# Altium PCB pcb.PcbDoc
Units mm, origin at the board's own origin, x right, y up, seen from the top; angles counter-clockwise.
Board outline 9 x 13 mm, 2 copper layers (Top Layer, Bottom Layer); 12 components, 13 nets, 55 pads, 0 vias.
Unrouted connection lines stored in the file: 2.
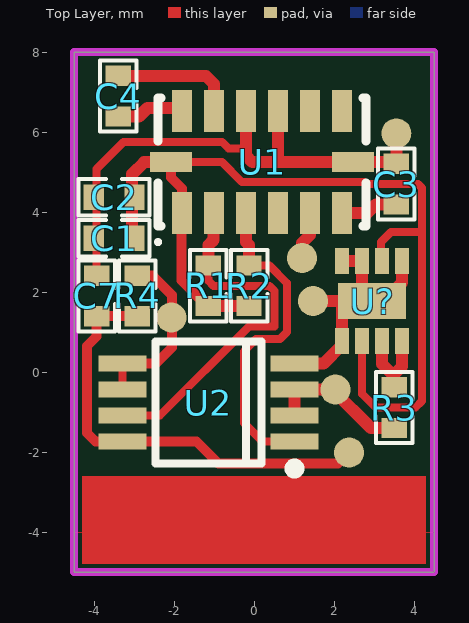
[diagram p0: Top Layer view]
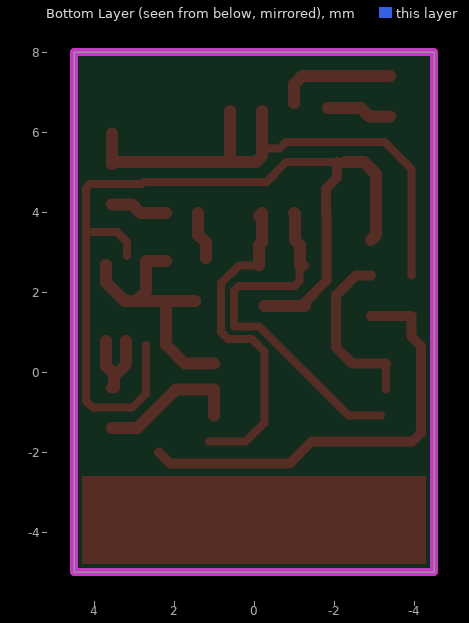
[diagram p1: Bottom Layer view, seen from below]
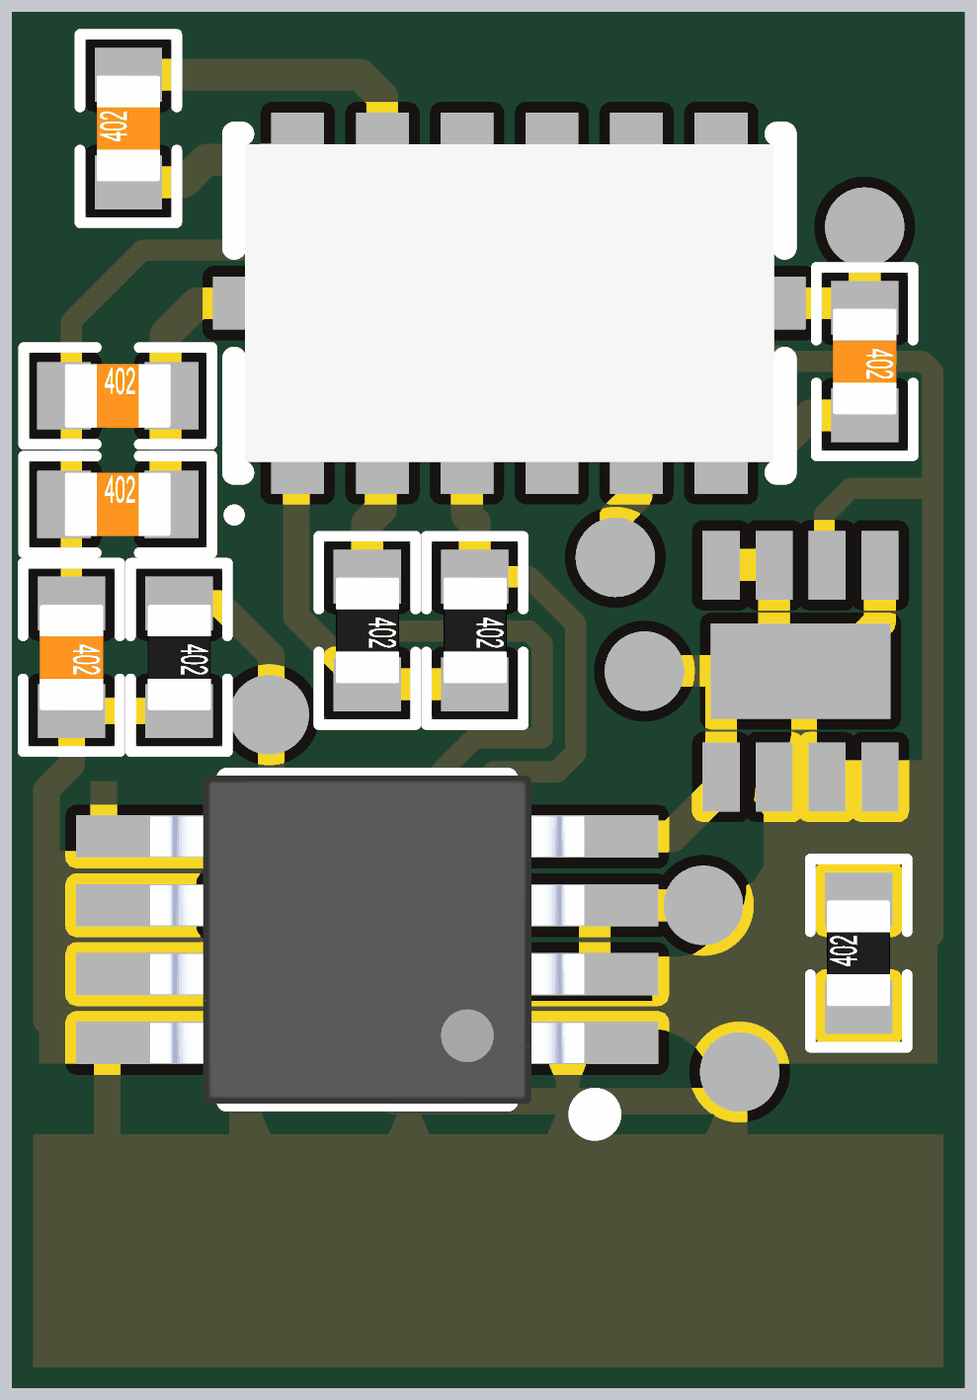
[diagram p2: 3D render of the assembled board from above, using the file's embedded part models]

## Layer stack, top to bottom
Top Solder: solder mask 0.0102, Solder Resist, Dk 3.5
Top Layer: signal copper 0.0356
Dielectric1: dielectric 0.32, FR-4, Dk 4.8
Bottom Layer: signal copper 0.0356
Bottom Solder: solder mask 0.0102, Solder Resist, Dk 3.5

## Board outline
-4.5,-4 -4.5,4.1 -4.5,4.091 -4.5,6.1 -4.5,8 4.5,8 4.5,-5 -4.5,-5

## Design rules (kind name [scope] priority, off if disabled: settings)
Clearance [All] p1: gap=0.1
FabricationTestPointUsage TestPointUsage [All] p1: valid=0 allowmultiple=FALSE
FabricationTestpoint Testpoint [All] p1: side=3 testpointundercomponent=TRUE minsize=1.016 maxsize=2.54 preferedsize=1.524 minholesize=0 maxholesize=1.016 preferedholesize=0.813 testpointgrid=0.025 allowsidetop=TRUE allowsidebottom=TRUE usegrid=TRUE gridtolerance=0
PlaneConnect [All] p1: planeconnectstyle=Relief reliefexpansion=0.508 reliefentries=4 reliefconductorwidth=0.4 reliefairgap=0.4
PolygonConnect [All] p1: connectstyle=Relief reliefconductorwidth=0.254 reliefentries=4 polygonreliefangle="90 Angle" airgapwidth=0.254
RoomDefinition sch [InComponentClass('sch')] p1: confinementstyle=ConfineIn formatcopy=TRUE lockcomponents=FALSE outline -29.537,-20.473 25.835,-20.473 25.835,24.18 -29.537,24.18
RoutingVias [All] p1: holewidth=0.5 width=1.2 viastyle="Through Hole" minholewidth=0.5 minwidth=1.2 maxholewidth=0.5 maxwidth=1.2
SolderMaskExpansion [All] p1: expansion=0.102
Width [All] p1: maxlimit=0.4 minlimit=0.2 preferedwidth=0.4 minimp=50.000000 maximp=50.000000 favimp=50.000000
27 further rules are at their usual default settings.

## Classes and differential pairs
component class sch: C1 C2 C3 C4 R1 R2 R3 R4 U1 U2 U?

## Components (designator, comment, footprint, x,y, rotation, side; value= is the part's Value field where it differs from the comment)
C1 "100nF" C0402 -3.5,3.35 r0 top
C2 "4,7uF" C0402 -3.5,4.375 r0 top
C3 "4,7uF" C0402 3.556,4.699 r270 top
C4 "220nF" C0402 -3.4,6.9 r90 top
C7 "4,7uF" C0402 -3.937,1.905 r270 top
R1 "4k3" R0402 -1.143,2.159 r270 top
R2 "4k3" R0402 -0.127,2.159 r270 top
R3 "4k3" R0402 3.5,-0.889 r90 top
R4 "4k3" R0402 -2.921,1.905 r270 top
U1 "LSM303DLHC" LGA80P500X300-14N 0.2,5.25 r90 top
U2 "P82B96DP" TSSOP8N -1.143,-0.762 r90 top
U? "MCP1710T-30I/LZ" VDFN8 2.95,1.775 r270 top

## Footprints (in the part's own frame and the unit in brackets; to place one, negate y for a bottom-side part, rotate by r counter-clockwise, add the part's x,y. Pads: shape width x height; smd on the part's side, far side on the other; paste and mask are expansions set on the pad)
C0402 [mil]
  rect 20x25 smd: 1(-20,0) 2(20,0)
  silkscreen extent -35,-18 35,18, body extent -20,-12 20,12, height 8
LGA80P500X300-14N [mm]
  rect 1.05x0.5 smd: 1(-1.275,2) 2(-1.275,1.2) 3(-1.275,0.4) 4(-1.275,-0.4) 5(-1.275,-1.2) 6(-1.275,-2) 8(1.275,-2) 9(1.275,-1.2) 10(1.275,-0.4) 11(1.275,0.4) 12(1.275,1.2) 13(1.275,2)
  rect 0.5x1.05 smd: 7(0,-2.275) 14(0,2.275)
  silkscreen extent -2.05,-2.6 1.6,2.65, body extent -1.5,-2.5 1.5,2.5, height 1.03
R0402 [mil]
  rect 20x25 smd: 1(-20,0) 2(20,0)
  silkscreen extent -35,-18 35,18, body extent -20,-12 20,12, height 8
TSSOP8N [mm]
  rect 0.4x1.2 smd: 1(-0.975,-2.15) 2(-0.325,-2.15) 3(0.325,-2.15) 4(0.975,-2.15) 5(0.975,2.15) 6(0.325,2.15) 7(-0.325,2.15) 8(-0.975,2.15)
  silkscreen extent -1.77,-2.27 1.52,1.33, body extent -1.55,-2.05 1.55,2.05, height 1.1
VDFN8 [mm] "Space Saving, 8-Lead Plastic 2mm x 2mm VDFN-8"
  rect 0.65x0.35 smd: 1(-1,0.75) 2(-1,0.25) 3(-1,-0.25) 4(-1,-0.75) 5(1,-0.75) 6(1,-0.25) 7(1,0.25) 8(1,0.75)
  rect 0.9x1.7 smd: 9(0,0)
  body extent -1,-1 1,1, height 0.9

## Part data
C1 C2 C3 C4 C7: library part Cap, "Capacitor"
R1 R2 R3 R4: library part Res, "Resistor"
U1: "Ultra compact high performance e-compass 3D accelerometer and  3D magnetometer module"
U2: "Dual Bidirectional I2C Bus Buffer, TSSOP8 Package"
U?: "200mA, Low Voltage, Low Quiescent Current (20nA) LDO Voltage Regulator"

## Free pads (board coordinates)
  round 0.75 smd: 10(-2.068,1.363) 10(1.2,2.85) 10(1.475,1.775) 10(2.032,-0.437) 10(2.375,-2.011) 10(3.556,5.969)

## Nets (pads, with @x,y where several pads share a name; then routed paths per layer and width w, separated by ;. In a path a pad name is that pad's centre, name@x,y a point inside that pad or via, vN(x,y) a via of type N, cw(c..) or ccw(c..) an arc to the next point about the centre after c; other vN are vias at no path point)
3V3: C1.2 C2.2 R1.2 R2.2 U1.1 U1.14 U?.2 U?.6 | length 24
  Top Layer w0.2: U1.14@-2.275,5.25 U1.14 -0.805,5.25 -0.308,4.753 2.747,4.753 2.8,4.7 4.1,4.7 4.2,4.6 4.2,-0.718 4.029,-0.889 3.048,-0.889 2.7,-0.541 U?.6@2.7,0.68 ; U?.2@3.175,2.901 3.175,3.25 3.425,3.5 4.196,3.5
  Top Layer w0.25: U1.14 -2.075,4.869 -1.8,4.594 U1.1 -1.813,3.962 -1.813,2.288 -1.27,1.745 R1.2@-1.27,1.651
  Top Layer w0.3: C1.2@-2.921,3.302 -3.048,3.429 -3.048,4.953 -2.751,5.25 U1.14@-2.275,5.25 ; R1.2@-1.27,1.651 R2.2@-0.254,1.651
5V: C7.2 pad.10@2.375,-2.011 R3.2 R4.2 U2.8 U?.7 U?.8 | length 13.3
  Top Layer w0.25: R4.2 C7.2 -3.937,0.889 -4.175,0.651 -4.175,-1.524 -3.962,-1.737 U2.8 -1.438,-1.737 -0.889,-2.286 2.1,-2.286 pad.10@2.375,-2.011
  Top Layer w0.3: U?.7 3.2,0.2 3.478,-0.078 ; R3.2 R3.2@3.5,-0.325 ; R3.2@3.556,-0.381 R3.2@3.5,-0.325 ; U?.8@3.7,0.778 U?.8 3.7,0.144 3.478,-0.078 ; 3.478,-0.078 3.5,-0.1 R3.2@3.5,-0.325
DRDY: U1.9
GND: C1.1 C2.1 C3.1 C7.1 pad.10@1.475,1.775 pad.10@3.556,5.969 U1.7 U1.10 U1.11 U2.4 U?.1 U?.3 U?.4 U?.5 U?.9 | length 20.7
  Top Layer w0.2: C7.1 -3.937,5.08 -3.267,5.75 -0.797,5.75 -0.635,5.588 -0.254,5.588
  Top Layer w0.3: U1.11 -0.2,5.407 -0.043,5.25 0.635,5.25 ; U1.10 0.6,5.285 0.635,5.25 ; U2.4 1.733,0.213 2.2,0.68 2.2,1.68 U?.9@2.298,1.778 ; pad.10@1.475,1.775 U?.9@2.298,1.778 ; U?.4@2.2,2.778 U?.3@2.7,2.778 ; U?.3 2.7,2.025 U?.9@2.947,1.778 ; U?.9 U?.9@2.947,1.778 ; C3.1 C3.1@3.556,5.25 ; pad.10@3.556,5.969 C3.1@3.556,5.25 ; U?.1@3.7,2.68 3.7,2.24 3.238,1.778 U?.9@2.947,1.778 ; 0.635,5.25 U1.7 C3.1@3.556,5.25 ; U?.9@2.298,1.778 U?.9@2.947,1.778
INT1: pad.10@1.2,2.85 U1.5 | length 1.2
  Top Layer w0.3: pad.10@1.2,2.85 1.2,3.232 1.4,3.432 U1.5
INT2: U1.4
NetC3_2: C3.2 U1.6 | length 1.4
  Top Layer w0.3: U1.6 2.832,3.975 3.048,4.191 C3.2
NetC4_1: C4.1 U1.13 | length 1.6
  Top Layer w0.3: C4.1 -2.879,6.392 -2.667,6.604 U1.13@-1.85,6.604
NetC4_2: C4.2 U1.12 | length 3
  Top Layer w0.3: C4.2 -1.208,7.408 -1,7.2 U1.12@-1,6.725
NetR1_1: R1.1 U1.2 U2.7 | length 9
  Top Layer w0.2: U2.7@-3.166,-1.087 -2.357,-1.087 -0.127,1.143 0.508,1.143 0.508,2.032 0.385,2.155 -1.012,2.155 -1.139,2.282 -1.139,2.536 R1.1@-1.27,2.667
  Top Layer w0.3: R1.1 -1.143,3.175 -1.016,3.302 -1.016,3.959 U1.2
NetR2_1: R2.1 U1.3 U2.1 | length 8.5
  Top Layer w0.2: R2.1 0.381,2.667 0.825,2.223 0.825,1 0.65,0.825 0.05,0.825 -0.254,0.521 -0.254,-1.27 0.213,-1.737 U2.1@1.134,-1.737
  Top Layer w0.3: R2.1 -0.127,3.175 -0.2,3.248 U1.3 U1.3@-0.127,3.902
SCL: pad.10@-2.068,1.363 R4.1 U2.5 U2.6 | length 4.4
  Top Layer w0.2: U2.6 U2.5
  Top Layer w0.25: U2.5 -2.454,0.213 -2.05,0.617 -2.05,1.923 -2.54,2.413 R4.1
SDA: pad.10@2.032,-0.437 R3.1 U2.2 U2.3 | length 3.6
  Top Layer w0.3: U2.2 U2.3 1.961,-0.437 2.921,-1.397 R3.1@3.556,-1.397
pads on no net: U1.8

## Polygon pours and split planes (outlines as drawn)
GND on Top Layer "Top Layer-No Net" (solid, shelved, pour order 2): -4.5,8 -4.5,-4 4.5,-4 4.5,8

## Keep-outs
Keep-Out Layer:
  lines w0.2: -4.5,4.091 -4.5,6.1 -4.5,8 4.5,8 4.5,6.1 4.5,4.1 4.5,-4 4.5,-5 -4.5,-5 -4.5,-4 -4.5,4.1

## Other copper
Top Layer:
  rectangle: -4.3,-4.8 4.3,-2.6
  pour cut-out: -4.5,8 4.5,8 4.5,2.5 -4.5,2.5 -4.5,3 -4.5,5.5

## Silkscreen, mask and mechanical layers (free items; w line width, h text height)
Mechanical 16:
  lines w0.127: -146.1,-39.74 -141.02,-39.74 ; -146.1,8.52 -141.02,8.52 ; -146.1,56.78 -141.02,56.78 ; -73.075,-88 -73.075,-82.92 ; -73.075,99.96 -73.075,105.04 ; -8.94,-82.92 26.62,-82.92 140.92,-82.92 ; -0.05,-88 -0.05,-82.92 ; -0.05,99.96 -0.05,105.04 ; 21.007,-82.895 21.032,-82.92 ; 35.842,-82.906 35.842,-59.818 140.913,-59.818 ; 35.868,-67.336 140.887,-67.336 ; 35.893,-75.312 140.887,-75.312 ; 54.823,-82.906 54.823,-75.312 ; 54.843,-79.325 140.887,-79.325 ; 72.975,-88 72.975,-82.92 ; 72.975,99.96 72.975,105.04 ; 86.363,-82.855 86.363,-75.337 ; 115.293,-75.312 115.293,-59.818 ; 130.318,-67.336 130.318,-59.821 ; 140.92,-39.74 146,-39.74 ; 140.92,8.52 146,8.52 ; 140.92,56.78 146,56.78 ; 140.92,-82.92 -141.02,-82.92 -141.02,99.96 140.92,99.96 140.92,-57.647 140.92,-82.92 ; -146.1,-88 146,-88 146,105.04 -146.1,105.04 -146.1,-88
  text "1" at -109.854,101.611 h1.78
  text "2" at -37.21,101.611 h1.78
  text "3" at 35.942,101.611 h1.78
  text "4" at 108.84,101.611 h1.78
  text "A" at -144.195,78.599 h1.78
  text "A" at 142.825,78.599 h1.78
  text "B" at -144.195,30.542 h1.78
  text "B" at 142.825,30.542 h1.78
  text "C" at -144.195,-17.972 h1.78
  text "C" at 142.825,-17.972 h1.78
  text "PROJECT NAME:" at 36.757,-61.824 h1.14
  text "REVISION:" at 116.207,-61.824 h1.14
  text "A4" at 133.668,-64.896 h2.29
  text "Project_Name" at 61.343,-65.228 h2.54
  text "0.0.0" at 119.493,-65.671 h1.78
  text "D" at -144.195,-65.978 h1.78
  text "D" at 142.825,-65.978 h1.78
  text "PROJECT NUMBER:" at 116.182,-69.343 h1.14
  text "TITLE:" at 36.731,-69.419 h1.14
  text "PCB_TITLE" at 66.55,-73.381 h2.16
  text "ONW-000" at 123.668,-73.52 h1.78
  text "DATE:" at 36.858,-77.521 h1.14
  text "NAME_1" at 104.626,-78.005 h1.52
  text "X" at 66.045,-78.08 h1.52
  text "DRAWN BY:" at 87.43,-78.081 h1.52
  text "of" at 69.728,-78.156 h1.52
  text "Y" at 74.148,-78.156 h1.52
  text "SHEET" at 56.266,-78.182 h1.52
  text "DD-MM-YYYY" at 38.027,-81.636 h1.52
  text "NAME_2" at 104.652,-81.637 h1.52
  text "CHECKED BY:" at 87.405,-81.764 h1.52
  text ".PCB_FILE_NAME_NO_PATH" at 56.165,-81.789 h1.52
  text "1" at -109.854,-86.349 h1.78
  text "2" at -37.21,-86.349 h1.78
  text "3" at 35.942,-86.349 h1.78
  text "4" at 108.84,-86.349 h1.78

## Dimensions
-4.5,-4 to 4.5,-5 on Mechanical 4
4.5,8 to -4.5,-5 on Mechanical 4